# Altium PCB controlo_rev3.PcbDoc
Units mil, origin at the board's own origin, x right, y up, seen from the top; angles counter-clockwise.
Board outline 3939.96 x 3929 mil, 2 copper layers (Top Layer, Bottom Layer); 108 components, 133 nets, 406 pads, 265 vias.
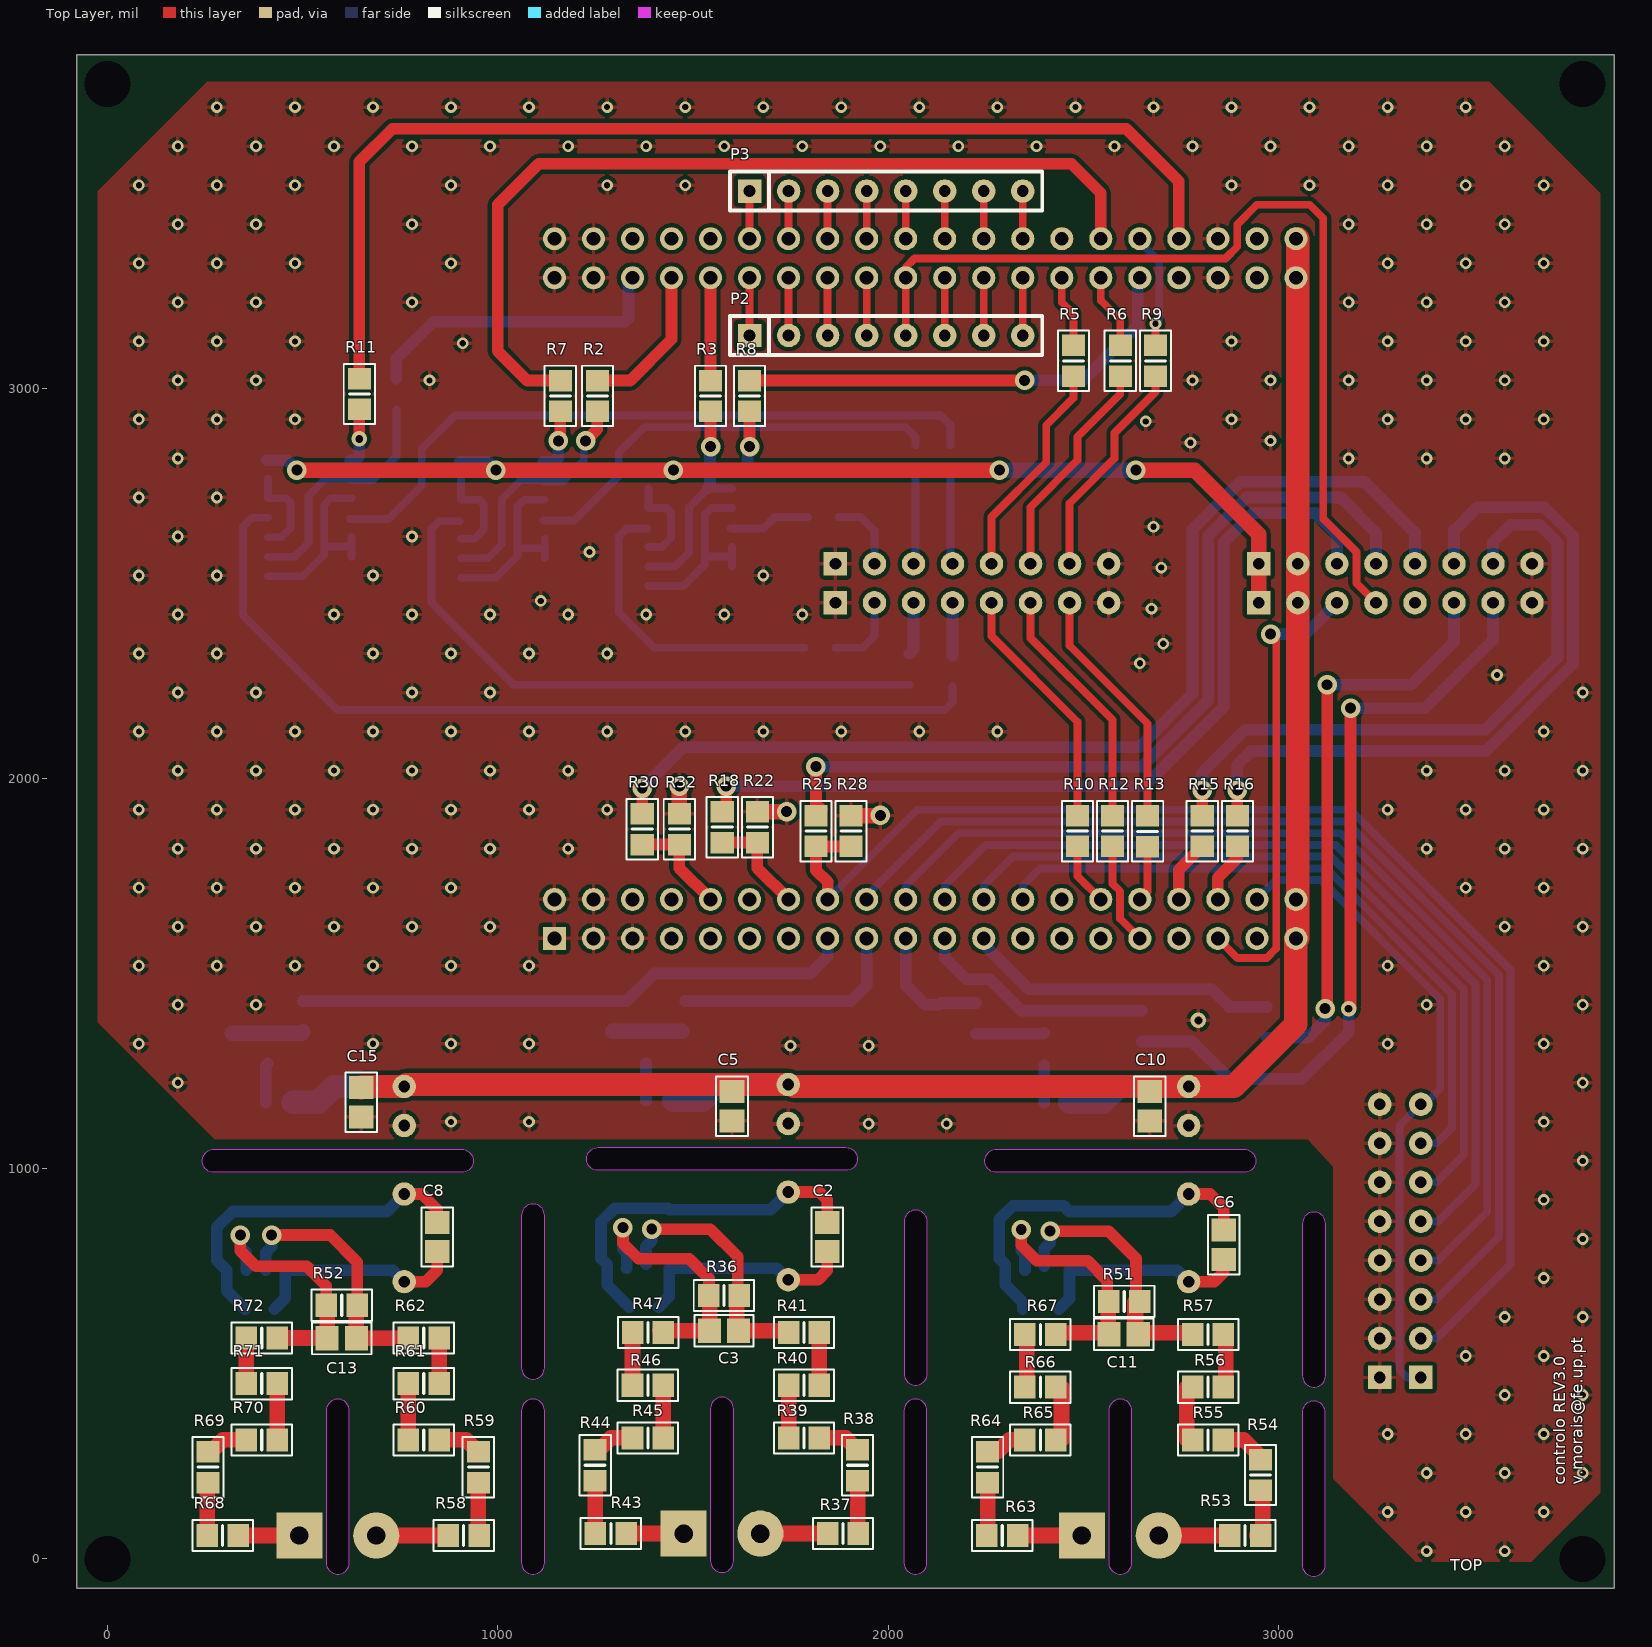
[diagram p0: Top Layer view]
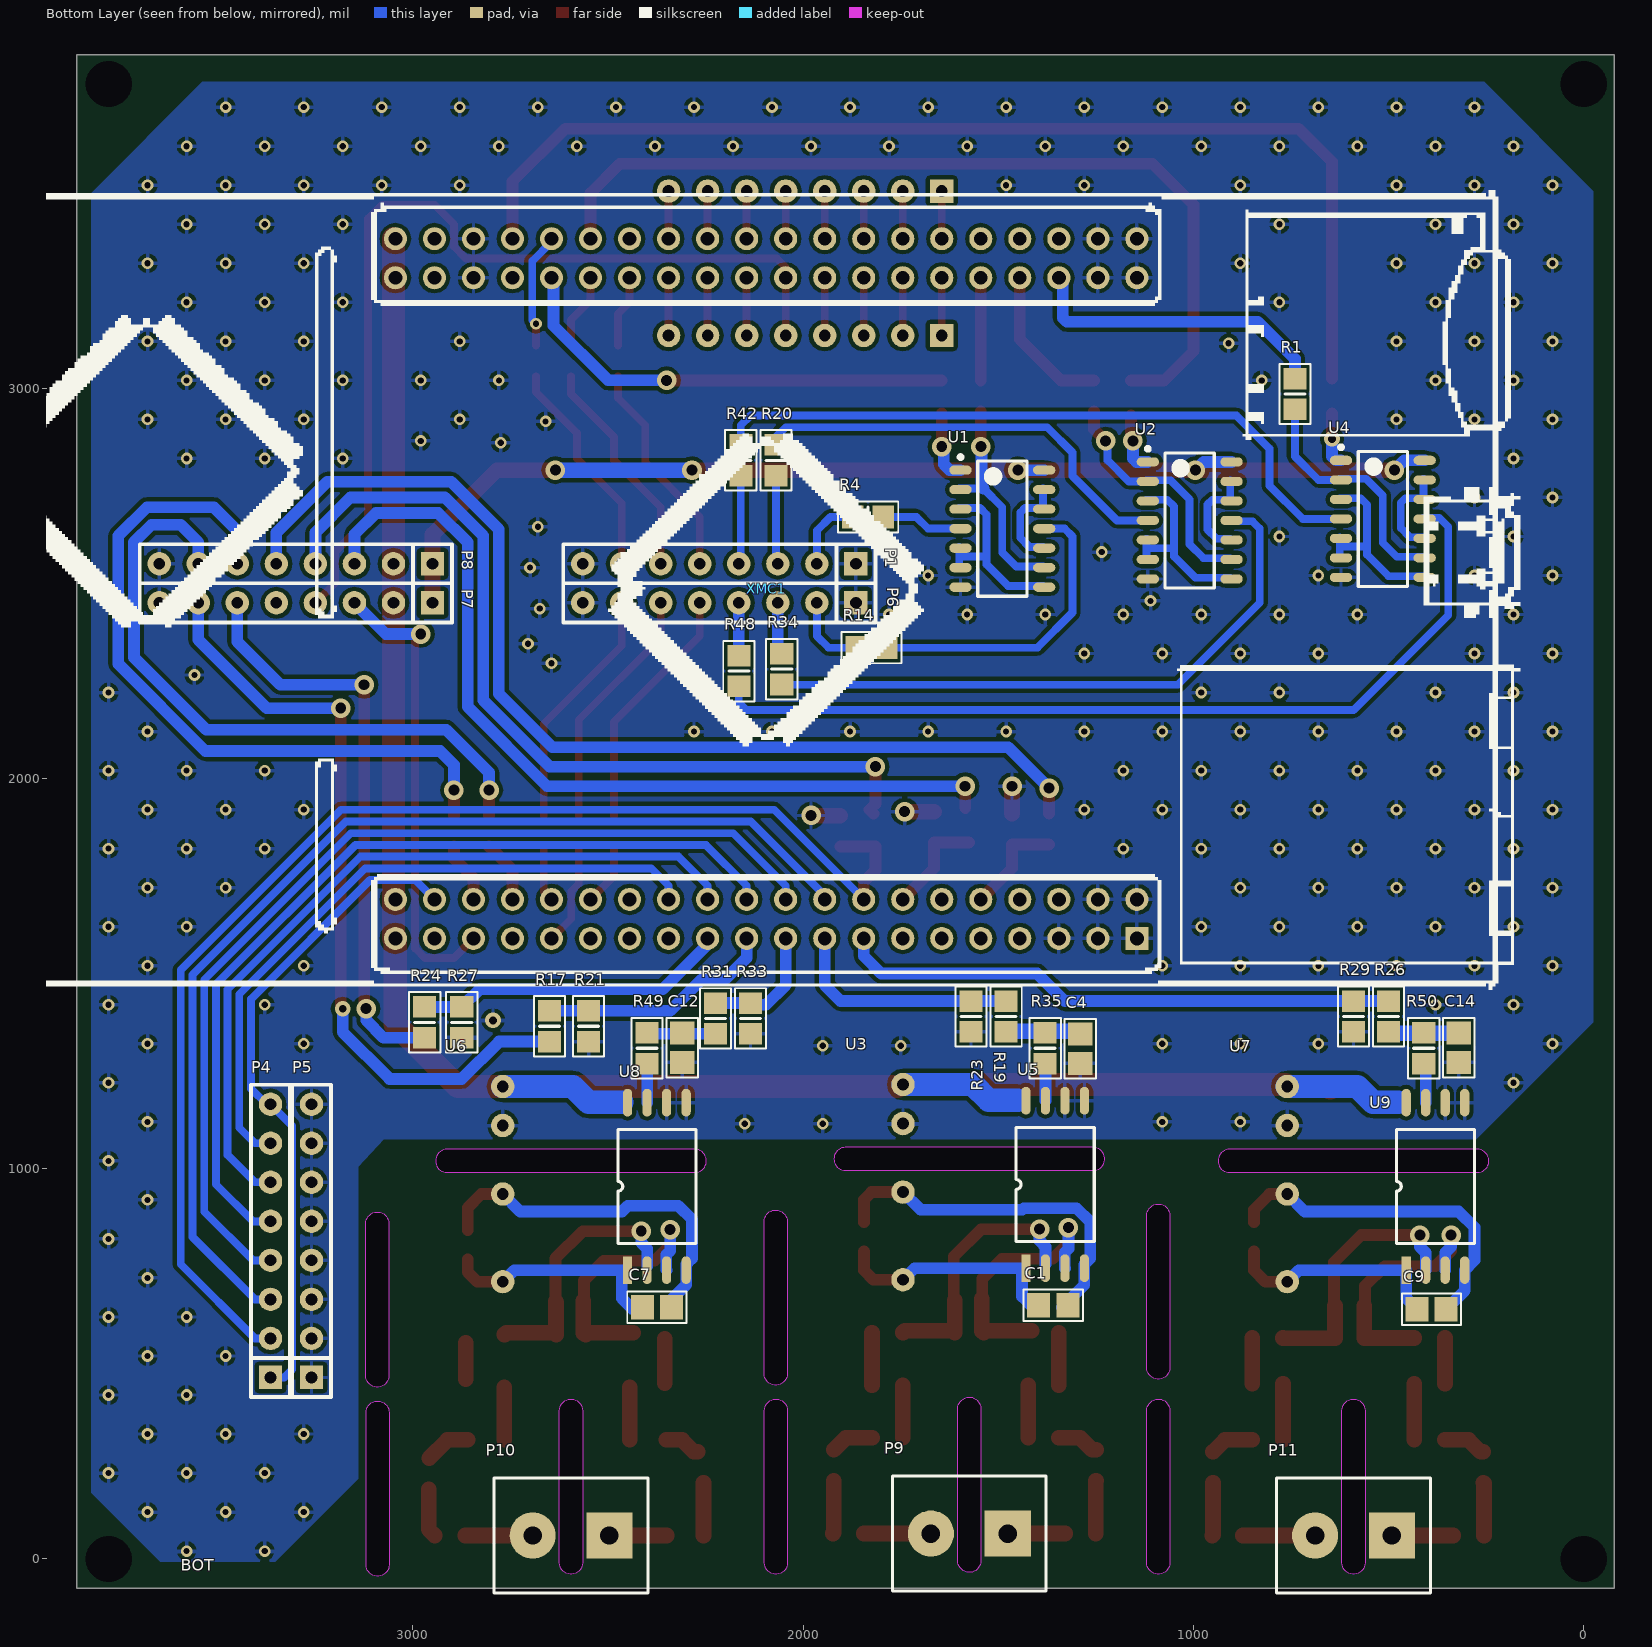
[diagram p1: Bottom Layer view, seen from below]

## Layer stack, top to bottom
Top Solder: solder mask 0.4, Solder Resist, Dk 3.5
Top Layer: signal copper 1.4
Dielectric 1: dielectric 12.6, FR-4, Dk 4.8
Bottom Layer: signal copper 1.4
Bottom Solder: solder mask 0.4, Solder Resist, Dk 3.5

## Board outline
-78.74,-75 805,-75 3220,-75 3861.22,-75 3861.22,3854 3220,3854 805,3854 -78.74,3854
cut-out: 560.46,-10 ccw(c590,-10) 619.54,-10 619.54,380 ccw(c590,380) 560.46,380
cut-out: 272.5,990.46 cw(c272.5,1020) 272.5,1049.54 907.5,1049.54 cw(c907.5,1020) 937.04,1020 cw(c907.5,1020) 907.5,990.46
cut-out: 1060.46,490 ccw(c1090,490) 1119.54,490 1119.54,880 ccw(c1090,880) 1060.46,880
cut-out: 1060.46,-10 ccw(c1090,-10) 1119.54,-10 1119.54,380 ccw(c1090,380) 1060.46,380
cut-out: 1256.87,995.46 cw(c1256.87,1025) 1256.87,1054.54 1891.87,1054.54 cw(c1891.87,1025) 1921.41,1025 cw(c1891.87,1025) 1891.87,995.46
cut-out: 1544.83,-5 ccw(c1574.37,-5) 1603.91,-5 1603.91,385 ccw(c1574.37,385) 1544.83,385
cut-out: 2041.09,474.41 ccw(c2070.63,474.41) 2100.17,474.41 2100.17,864.41 ccw(c2070.63,864.41) 2041.09,864.41
cut-out: 2040.46,-10 ccw(c2070,-10) 2099.54,-10 2099.54,380 ccw(c2070,380) 2040.46,380
cut-out: 2277.5,990.46 cw(c2277.5,1020) 2277.5,1049.54 2912.5,1049.54 cw(c2912.5,1020) 2942.04,1020 cw(c2912.5,1020) 2912.5,990.46
cut-out: 2565.46,-10 ccw(c2595,-10) 2624.54,-10 2624.54,380 ccw(c2595,380) 2565.46,380
cut-out: 3061.72,469.41 ccw(c3091.26,469.41) 3120.8,469.41 3120.8,859.41 ccw(c3091.26,859.41) 3061.72,859.41
cut-out: 3061.09,-15 ccw(c3090.63,-15) 3120.17,-15 3120.17,375 ccw(c3090.63,375) 3061.09,375

## Design rules (kind name [scope] priority, off if disabled: settings)
Clearance [All] p1: gap=10 ignorepadtopadclearanceinfootprint=FALSE
Height [All] p1: minheight=0 maxheight=10000 prefheight=500
HoleSize [All] p1: absolutevalues=TRUE maxlimit=1000 minlimit=1 maxpercent=80.000 minpercent=20.000
PlaneClearance [All] p1: clearance=100
PolygonConnect [All] p1: connectstyle=Relief reliefconductorwidth=10 reliefentries=4 polygonreliefangle="90 Angle" airgapwidth=10
RoomDefinition controlo_rev3 [InComponentClass('controlo_rev3')] p1: confinementstyle=ConfineIn formatcopy=TRUE lockcomponents=FALSE outline -1717.05,-3406.5 282.95,-3406.5 282.95,-2406.5 -1717.05,-2406.5
RoutingVias [All] p1: holewidth=28 width=50 viastyle="Through Hole" minholewidth=28 minwidth=50 maxholewidth=28 maxwidth=50
SilkToSilkClearance [All] p1: silktosilkclearance=1
SilkToSolderMaskClearance [IsPad] p1: minsilkscreentomaskgap=1 clearancetoexposedcopper=TRUE
SolderMaskExpansion [All] p1: expansion=4
Width [All] p1: maxlimit=150 minlimit=10 preferedwidth=30
25 further rules are at their usual default settings.

## Components (designator, comment, footprint, x,y, rotation, side; value= is the part's Value field where it differs from the comment)
C1 "C 10uF 0805 MLCC 25V X5R" CAPC_0805 1359.37,650 r0 bottom
C2 "C 10uF 0805 MLCC 25V X5R" CAPC_0805 1844.37,825 r270 top
C3 "C 1uF 0805 MLCC 50V X5R" CAPC_0805 1579.37,585 r180 top
C4 "C 10nF 0805 MLCC 50V X7R" CAPC_0805 1290,1307.18 r90 bottom
C5 "C 10uF 0805 MLCC 25V X5R" CAPC_0805 1600,1160 r90 top
C6 "C 10uF 0805 MLCC 25V X5R" CAPC_0805 2860,805 r270 top
C7 "C 10uF 0805 MLCC 25V X5R" CAPC_0805 2375,645 r0 bottom
C8 "C 10uF 0805 MLCC 25V X5R" CAPC_0805 845,825 r270 top
C9 "C 10uF 0805 MLCC 25V X5R" CAPC_0805 390,640 r0 bottom
C10 "C 10uF 0805 MLCC 25V X5R" CAPC_0805 2670,1160 r90 top
C11 "C 1uF 0805 MLCC 50V X5R" CAPC_0805 2603.59,575.54 r180 top
C12 "C 10nF 0805 MLCC 50V X7R" CAPC_0805 2310,1310 r90 bottom
C13 "C 1uF 0805 MLCC 50V X5R" CAPC_0805 600,565 r180 top
C14 "C 10nF 0805 MLCC 50V X7R" CAPC_0805 320,1310 r90 bottom
C15 "C 10uF 0805 MLCC 25V X5R" CAPC_0805 650,1170 r90 top
P1 "P 8p 2.54 SR DW 8P" "Header 8x1 8.5mm" 1865,2550 r0 bottom locked
P2 "P 8p 2.54 SR DW 8P" "Header 8x1 8.5mm" 1645,3135 r0 top
P3 "P 8p 2.54 SR DW 8P" "Header 8x1 8.5mm" 1645,3505 r0 top
P4 "P 8p 2.54 SR DW 8P" "Header 8x1 8.5mm" 3365,465 r90 bottom
P5 "P 8p 2.54 SR DW 8P" "Header 8x1 8.5mm" 3260,465 r90 bottom
P6 "P 8p 2.54 SR DW 8P" "Header 8x1 8.5mm" 1865,2450 r0 bottom locked
P7 "P 8p 2.54 SR DW 8P" "Header 8x1 8.5mm" 2950,2450 r0 bottom locked
P8 "P 8p 2.54 SR DW 8P" "Header 8x1 8.5mm" 2950,2550 r0 bottom locked
P9 "P 2p 5mm" connector1x2_parafuso 1574.37,65 r0 bottom
P10 "P 2p 5mm" connector1x2_parafuso 2595,60 r0 bottom
P11 "P 2p 5mm" connector1x2_parafuso 590,60 r0 bottom
R1 "R 0 1/8W 0805" RESC_0805 740,2985 r90 bottom
R2 "R 0 1/8W 0805" RESC_0805 1255,2980 r90 top
R3 "R 0 1/8W 0805" RESC_0805 1545,2980 r90 top
R4 "R 0 1/8W 0805" RESC_0805 1833.93,2670 r0 bottom
R5 "R 0 1/8W 0805" RESC_0805 2475,3070 r90 top
R6 "R 0 1/8W 0805" RESC_0805 2595,3070 r90 top
R7 "R 0 1/8W 0805" RESC_0805 1160,2980 r270 top
R8 "R 0 1/8W 0805" RESC_0805 1645,2980 r90 top
R9 "R 0 1/8W 0805" RESC_0805 2685,3070 r90 top
R10 "R 0 1/8W 0805" RESC_0805 2485,1865 r90 top
R11 "R 0 1/8W 0805" RESC_0805 645,2985 r270 top
R12 "R 0 1/8W 0805" RESC_0805 2575,1865 r270 top
R13 "R 0 1/8W 0805" RESC_0805 2665,1864.37 r90 top
R14 "R 0 1/8W 0805" RESC_0805 1825,2335 r0 bottom
R15 "R 0 1/8W 0805" RESC_0805 2805,1865 r90 top
R16 "R 0 1/8W 0805" RESC_0805 2895,1865 r90 top
R17 "R 5k1 1/8W 0805 .1%" RESC_0805 2650,1365 r270 bottom
R18 "R 5k1 1/8W 0805 .1%" RESC_0805 1575,1875 r90 top
R19 "R 5k1 1/8W 0805 .1%" RESC_0805 1480,1390 r270 bottom
R20 "R 0 1/8W 0805" RESC_0805 2070,2815 r270 bottom
R21 "R 7k5 1/8W 0805 .1%" RESC_0805 2550,1365 r90 bottom
R22 "R 7k5 1/8W 0805 .1%" RESC_0805 1665,1875 r270 top
R23 "R 7k5 1/8W 0805 .1%" RESC_0805 1570,1390 r90 bottom
R24 "R 5k1 1/8W 0805 .1%" RESC_0805 2970,1375 r270 bottom
R25 "R 5k1 1/8W 0805 .1%" RESC_0805 1815,1865 r90 top
R26 "R 5k1 1/8W 0805 .1%" RESC_0805 500,1390 r270 bottom
R27 "R 7k5 1/8W 0805 .1%" RESC_0805 2875,1375 r90 bottom
R28 "R 7k5 1/8W 0805 .1%" RESC_0805 1905,1865 r270 top
R29 "R 7k5 1/8W 0805 .1%" RESC_0805 590,1390 r90 bottom
R30 "R 5k1 1/8W 0805 .1%" RESC_0805 1370,1870 r90 top
R31 "R 5k1 1/8W 0805 .1%" RESC_0805 2225,1385 r270 bottom
R32 "R 7k5 1/8W 0805 .1%" RESC_0805 1465,1870 r270 top
R33 "R 7k5 1/8W 0805 .1%" RESC_0805 2135,1385 r90 bottom
R34 "R 0 1/8W 0805" RESC_0805 2055,2280 r90 bottom
R35 "R 330 1/8 0805 .1%" RESC_0805 1380,1308.59 r90 bottom
R36 "R 3k6 1/8W 0805 .1%" RESC_0805 1579.37,675 r180 top
R37 "R 100k 1/8W 0805 .1%" RESC_0805 1884.37,65 r0 top
R38 "R 100k 1/8W 0805 .1%" RESC_0805 1921.77,240 r90 top
R39 "R 100k 1/8W 0805 .1%" RESC_0805 1784.37,310 r180 top
R40 "R 100k 1/8W 0805 .1%" RESC_0805 1784.37,445 r0 top
R41 "R 100k 1/8W 0805 .1%" RESC_0805 1784.37,580 r180 top
R42 "R 0 1/8W 0805" RESC_0805 2160,2815 r270 bottom
R43 "R 100k 1/8W 0805 .1%" RESC_0805 1289.37,65 r180 top
R44 "R 100k 1/8W 0805 .1%" RESC_0805 1249.37,240 r90 top
R45 "R 100k 1/8W 0805 .1%" RESC_0805 1384.37,310 r0 top
R46 "R 100k 1/8W 0805 .1%" RESC_0805 1384.37,445 r180 top
R47 "R 100k 1/8W 0805 .1%" RESC_0805 1385,580 r0 top
R48 "R 0 1/8W 0805" RESC_0805 2165,2275 r90 bottom
R49 "R 330 1/8 0805 .1%" RESC_0805 2400,1308.59 r90 bottom
R50 "R 330 1/8 0805 .1%" RESC_0805 410,1308.59 r90 bottom
R51 "R 3k6 1/8W 0805 .1%" RESC_0805 2605,660 r180 top
R52 "R 3k6 1/8W 0805 .1%" RESC_0805 600,650 r180 top
R53 "R 100k 1/8W 0805 .1%" RESC_0805 2915,60 r0 top
R54 "R 100k 1/8W 0805 .1%" RESC_0805 2954.37,215 r90 top
R55 "R 100k 1/8W 0805 .1%" RESC_0805 2820,305 r180 top
R56 "R 100k 1/8W 0805 .1%" RESC_0805 2820,440 r0 top
R57 "R 100k 1/8W 0805 .1%" RESC_0805 2820,575 r180 top
R58 "R 100k 1/8W 0805 .1%" RESC_0805 912.46,60 r0 top
R59 "R 100k 1/8W 0805 .1%" RESC_0805 949.86,235 r90 top
R60 "R 100k 1/8W 0805 .1%" RESC_0805 810,305 r180 top
R61 "R 100k 1/8W 0805 .1%" RESC_0805 810,448.93 r0 top
R62 "R 100k 1/8W 0805 .1%" RESC_0805 810,566.07 r180 top
R63 "R 100k 1/8W 0805 .1%" RESC_0805 2292.4,60 r180 top
R64 "R 100k 1/8W 0805 .1%" RESC_0805 2255,235 r90 top
R65 "R 100k 1/8W 0805 .1%" RESC_0805 2390,305 r0 top
R66 "R 100k 1/8W 0805 .1%" RESC_0805 2390,440 r180 top
R67 "R 100k 1/8W 0805 .1%" RESC_0805 2390,575 r0 top
R68 "R 100k 1/8W 0805 .1%" RESC_0805 294.86,60 r180 top
R69 "R 100k 1/8W 0805 .1%" RESC_0805 257.46,235 r90 top
R70 "R 100k 1/8W 0805 .1%" RESC_0805 395,305 r0 top
R71 "R 100k 1/8W 0805 .1%" RESC_0805 395,448.93 r180 top
R72 "R 100k 1/8W 0805 .1%" RESC_0805 395,566.07 r0 top
U1 "IC NAND HEF4011" SOIC-14N 1489.72,2640 r180 bottom
U2 "IC NAND HEF4011" SOIC-14N 1009.72,2661 r180 bottom
U3 "IC CC/CC 1W 5V" DC/DC_ISO 1744.37,1215.59 r270 bottom
U4 "IC NAND HEF4011" SOIC-14N 514.72,2665 r180 bottom
U5 "IC AmpIso BIPOL AMC1200" SOIC8 1429.37,745 r90 bottom
U6 "IC CC/CC 1W 5V" DC/DC_ISO 2770,1210.59 r270 bottom
U7 "IC CC/CC 1W 5V" DC/DC_ISO 760,1210.59 r270 bottom
U8 "IC AmpIso BIPOL AMC1200" SOIC8 2450,740 r90 bottom
U9 "IC AmpIso BIPOL AMC1200" SOIC8 455,740 r90 bottom
XMC1 "IC XMC4500 Relax LITE" XMC4500 2095,2486.46 r270 bottom locked

## Footprints (in the part's own frame and the unit in brackets; to place one, negate y for a bottom-side part, rotate by r counter-clockwise, add the part's x,y. Pads: shape width x height; smd on the part's side, far side on the other; paste and mask are expansions set on the pad)
CAPC_0805 [mm] "Chip Capacitor, Body 2.0x1.3mm, IPC Low Density"
  rect 1.5x1.6 smd: 1(-0.95,0) 2(0.95,0)
  silkscreen extent -1.93,-1.03 1.93,1.03, body extent -1.1,-0.72 1.1,0.72, height 1.1
connector1x2_parafuso [mm] "Connector; Header; 2 Position"
  rect 3x3 hole 1.2: 1(-2.5,0)
  round 3 hole 1.2: 2(2.5,0)
  silkscreen extent -5,-3.75 5,3.75, body extent -4.92,-4.53 5.68,4.47, height 14.6
DC/DC_ISO [mil]
  round 60 hole 30: 1(0,0) 2(100,0) 3(275.59,0) 4(500,0)
  body extent -54,-149 572,80, height 315
"Header 8x1 8.5mm" [mil] "Stackable 8 pin header"
  rect 60x60 hole 30: 1(0,0)
  round 60 hole 30: 2(100,0) 3(200,0) 4(300,0) 5(400,0) 6(500,0) 7(600,0) 8(700,0)
  silkscreen extent -50,-50 750,50, body extent -50,-50 750,50, height 335
RESC_0805 [mm] "Chip Resistor, Body 2.0x1.3mm, IPC Low Density"
  rect 1.4x1.5 smd: 1(-1,0) 2(1,0)
  silkscreen extent -1.96,-1.01 1.96,1.01, body extent -1.07,-0.7 1.08,0.7, height 0.65
SOIC8 [mm]
  rect 1.8x0.6 smd: 1(0,0)
  oval 1.8x0.6 smd: 2(0,-1.27) 3(0,-2.54) 4(0,-3.81) 5(10.9,-3.81) 6(10.9,-2.54) 7(10.9,-1.27) 8(10.9,0)
  silkscreen extent 1.73,-4.45 9.17,0.63, body extent 1.7,-4.52 9.22,0.69, height 3
SOIC-14N [mm] "SOIC, 14-Leads, Body 8,65x3,90mm, Pitch 1,27mm, IPC Medium Density"
  oval 1.45x0.6 smd: 1(-2.725,3.81) 2(-2.725,2.54) 3(-2.725,1.27) 4(-2.725,0) 5(-2.725,-1.27) 6(-2.725,-2.54) 7(-2.725,-3.81) 8(2.725,-3.81) 9(2.725,-2.54) 10(2.725,-1.27) 11(2.725,0) 12(2.725,1.27) 13(2.725,2.54) 14(2.725,3.81)
  silkscreen extent -2.85,-4.4 1.6,4.78, body extent -2,-4.4 2,4.4, height 1.75
XMC4500 [mm]
  rect 1.5x1.5 hole 0.9: 1(22.77,24.13)
  round 1.5 hole 0.9: 2(22.77,21.59) 3(22.77,19.05) 4(22.77,16.51) 5(22.77,13.97) 6(22.77,11.43) 7(22.77,8.89) 8(22.77,6.35) 9(22.77,3.81) 10(22.77,1.27) 11(22.77,-1.27) 12(22.77,-3.81) 13(22.77,-6.35) 14(22.77,-8.89) 15(22.77,-11.43) 16(22.77,-13.97) 17(22.77,-16.51) 18(22.77,-19.05) 19(22.77,-21.59) 20(22.77,-24.13) 21(20.23,-24.13) 22(20.23,-21.59) 23(20.23,-19.05) 24(20.23,-16.51) 25(20.23,-13.97) 26(20.23,-11.43) 27(20.23,-8.89) 28(20.23,-6.35) 29(20.23,-3.81) 30(20.23,-1.27) 31(20.23,1.27) 32(20.23,3.81) 33(20.23,6.35) 34(20.23,8.89) 35(20.23,11.43) 36(20.23,13.97) 37(20.23,16.51) 38(20.23,19.05) 39(20.23,21.59) 40(20.23,24.13) 41(-20.23,24.13) 42(-20.23,21.59) 43(-20.23,19.05) 44(-20.23,16.51) 45(-20.23,13.97) 46(-20.23,11.43) 47(-20.23,8.89) 48(-20.23,6.35) 49(-20.23,3.81) 50(-20.23,1.27) 51(-20.23,-1.27) 52(-20.23,-3.81) 53(-20.23,-6.35) 54(-20.23,-8.89) 55(-20.23,-11.43) 56(-20.23,-13.97) 57(-20.23,-16.51) 58(-20.23,-19.05) 59(-20.23,-21.59) 60(-20.23,-24.13) 61(-22.77,-24.13) 62(-22.77,-21.59) 63(-22.77,-19.05) 64(-22.77,-16.51) 65(-22.77,-13.97) 66(-22.77,-11.43) 67(-22.77,-8.89) 68(-22.77,-6.35) 69(-22.77,-3.81) 70(-22.77,-1.27) 71(-22.77,1.27) 72(-22.77,3.81) 73(-22.77,6.35) 74(-22.77,8.89) 75(-22.77,11.43) 76(-22.77,13.97) 77(-22.77,16.51) 78(-22.77,19.05) 79(-22.77,21.59) 80(-22.77,24.13)
  silkscreen extent -25.92,-53.34 26.1,49.07, body extent -24.04,-25.4 24.04,25.4, height 8.5

## Part data
C1 C2 C5 C6 C7 C8 C9 C10 C15: library part "Capacitor SMD", "Capacitores de cerâmica multicamada MLCC - SMD/SMT 10uF 25V X5R +/-10% 0805 Gen Purp", Mouser VPN=963-TMK212BBJ106KG-T, Price=0,162
C3 C11 C13: library part "Capacitor SMD", "Capacitores de cerâmica multicamada MLCC - SMD/SMT 0805 50V 1uF 20% X5R", Mouser VPN=963-UMK212BJ105MG-T, Price=0,153
C4 C12 C14: library part "Capacitor SMD", "Capacitores de cerâmica multicamada MLCC - SMD/SMT 10nF 50V X7R 10%", Mouser VPN=603-CC805KRX7R9BB103, Price=0,099
P1 P2 P3 P4 P5 P6 P7 P8: library part jumper_8p, "Distribuidores e Alojamento de Fios CGrid Hrd SRDW THo le 8ckt", Mouser VPN=538-87937-0800, Price=0,621
P9 P10 P11: library part gen_purpose_conn_1x2, "Bloques de terminales de PCB de perfil estándar RS de 5,0 mm", Price=0,24, RS VPN=896-6696
R1 R2 R3 R4 R5 R6 R7 R8 R9 R10 R11 R12 R13 R14 R15 R16 R20 R34 R42 R48: library part Resistor, "Resistores de Filme Espesso - SMD 1/8Watt 0ohms Commercial Use", Mouser VPN=71-CRCW08050000Z0EAC, Price=0,09
R17 R18 R19 R24 R25 R26 R30 R31: library part Resistor, "Resistores de Filme Fino - SMD 0805 5.1Kohm 1/8W .1% 25ppm", Mouser VPN=667-ERA-6AEB512V, Price=0,324
R21 R22 R23 R27 R28 R29 R32 R33: library part Resistor, "Resistores de Filme Fino - SMD 7.5K OHM .1% 25ppm", Mouser VPN=66-PCF08C7.5KB, Price=0,135
R35 R49 R50: library part Resistor, "Resistores de Filme Fino - SMD CPF 0805 330R 0.1% 25PPM 1K RL", Mouser VPN=279-CPF0805B330RE1, Price=0,126
R36 R51 R52: library part Resistor, "Resistores de Filme Fino - SMD 1/8W 3.6K ohm .1% 25ppm", Mouser VPN=603-RT0805BRD073K6L, Price=0,387
R37 R38 R39 R40 R41 R43 R44 R45 R46 R47 R53 R54 R55 R56 R57 R58 R59 R60 R61 R62 R63 R64 R65 R66 R67 R68 R69 R70 R71 R72: library part Resistor, "Resistores de Filme Fino - SMD 100 Kohm .1% 0805 25PPM", Mouser VPN=284-APC0805B100KN, Price=0,126
U1 U2 U4: library part HEF4011, "Portas lógicas QUADRUPLE 2-INPUT NAND GATE", Mouser VPN=771-HEF4011BTD-T, Price=0,296
U3 U6 U7: library part DC/DC_ISO, "Conversores CC/CC com isolação 1W 5Vin 5Vout 200mA SIP7", Mouser VPN=919-RFB-0505S, Price=1,4
U5 U8 U9: library part AMC1200, "Amplificadores de isolamento 4kV peak Iso Amp", Mouser VPN=595-AMC1200BDWVR, Price=4,62
XMC1: library part XMC4500, "\"  KIT_XMC45_RELAX_LITE_V1 -  Evaluation Board, XMC4500 MCU, Detachable On-Board Debugger, USB Powered \"", Farnell VPN=2443552, Price=14,628, RS VPN=251-8418

## Free pads (board coordinates)
  round 60 hole 118.11 unplated: 4(0,0) 4(0,3779.53) 4(3779.53,0) 4(3779.53,3779.53)

## Via types
v1: diameter 30, hole 15.75, Top Layer to Bottom Layer, 234 vias
v2: diameter 50, hole 28, Top Layer to Bottom Layer, 28 vias
v3: diameter 40, hole 20, Top Layer to Bottom Layer, 3 vias

## Nets (pads, with @x,y where several pads share a name; then routed paths per layer and width w, separated by ;. In a path a pad name is that pad's centre, name@x,y a point inside that pad or via, vN(x,y) a via of type N, cw(c..) or ccw(c..) an arc to the next point about the centre after c; other vN are vias at no path point)
3V3: P7.1 P8.1 U1.14 U2.14 U4.14 | length 2965.1
  Top Layer w40: v2(485,2790) v2(995,2790) v2(1450,2790) v2(2285,2790) ; v2(2635,2790) 2785,2790 2950,2625 P8.1 P7.1
  Bottom Layer w30: U4.14 460,2815 v2(485,2790) ; U2.14 974,2811 v2(995,2790) ; U1.14 v2(1450,2790)
  Bottom Layer w40: v2(2285,2790) v2(2635,2790)
3V3GND: C4.1 C5.1 C10.1 C12.1 C14.1 C15.1 P1.1 P1.8 P5.1 P5.2 P5.3 P5.4 P5.5 P5.6 P5.7 P5.8 P6.1 P6.8 P7.8 P8.8 R21.1 R22.1 R23.1 R27.1 R28.1 R29.1 R32.1 R33.1 U1.7 U2.7 U3.2 U4.7 U5.5 U5.6 U6.2 U7.2 U8.5 U8.6 U9.5 U9.6 XMC1.1 XMC1.2 XMC1.3 XMC1.39 XMC1.40 XMC1.41 XMC1.42 XMC1.58 XMC1.63 XMC1.79 XMC1.80 | length 219.4
  Top Layer w40: R32.1 v2(1465,1980) ; R22.1 v2@1739.37,1914.37 ; R28.1 v2@1979.37,1904.37
  other v1: 3380,20 3580,20 3280,120 3480,120 3680,120 3380,220 3580,220 3780,220 3280,320 3480,320 3680,320 3580,420 3780,420 3480,520 3680,520 3580,620 3780,620 3680,720 3780,820 3680,920 3780,1020 1950,1115 2150,1115 880,1120 1080,1120 3680,1120 180,1220 3780,1220 1750,1315 1950,1315 80,1320 680,1320 880,1320 1080,1320 3280,1320 3680,1320 180,1420 380,1420 3380,1420 3780,1420 80,1520 280,1520 480,1520 680,1520 880,1520 1080,1520 3280,1520 3680,1520 180,1620 380,1620 580,1620 780,1620 980,1620 3580,1620 3780,1620 80,1720 280,1720 480,1720 680,1720 880,1720 3480,1720 3680,1720 180,1820 380,1820 580,1820 780,1820 980,1820 1180,1820 3380,1820 3580,1820 3780,1820 80,1920 280,1920 480,1920 680,1920 880,1920 1080,1920 1280,1920 3280,1920 3480,1920 3680,1920 180,2020 380,2020 580,2020 780,2020 980,2020 1180,2020 3380,2020 3580,2020 3780,2020 80,2120 280,2120 480,2120 680,2120 880,2120 1080,2120 1280,2120 1480,2120 1680,2120 1880,2120 2080,2120 2280,2120 3680,2120 180,2220 380,2220 780,2220 980,2220 3780,2220 3560,2265 2645,2295 80,2320 280,2320 680,2320 880,2320 1080,2320 1280,2320 2705,2345 180,2420 580,2420 780,2420 980,2420 1180,2420 1380,2420 1580,2420 1780,2420 2675,2435 1110,2455 80,2520 280,2520 680,2520 1680,2520 2700,2540 1235,2580 180,2620 780,2620 2680,2645 80,2720 280,2720 180,2820 3180,2820 3380,2820 3580,2820 2775,2860 2980,2865 2660,2915 80,2920 280,2920 480,2920 2880,2920 3280,2920 3480,2920 3680,2920 180,3020 380,3020 825,3020 2780,3020 2980,3020 3180,3020 3380,3020 3580,3020 910,3115 80,3120 280,3120 480,3120 2880,3120 3280,3120 3480,3120 3680,3120 180,3220 380,3220 780,3220 3180,3220 3380,3220 3580,3220 80,3320 280,3320 480,3320 880,3320 3280,3320 3480,3320 3680,3320 180,3420 380,3420 780,3420 3180,3420 3380,3420 3580,3420 80,3520 280,3520 480,3520 880,3520 1280,3520 1480,3520 2880,3520 3080,3520 3280,3520 3480,3520 3680,3520 180,3620 380,3620 580,3620 780,3620 980,3620 1180,3620 1380,3620 1580,3620 1780,3620 1980,3620 2180,3620 2380,3620 2580,3620 2780,3620 2980,3620 3180,3620 3380,3620 3580,3620 280,3720 480,3720 680,3720 880,3720 1080,3720 1280,3720 1480,3720 1680,3720 1880,3720 2080,3720 2280,3720 2480,3720 2680,3720 2880,3720 3080,3720 3280,3720 3480,3720
  other v2: 1980,1905 1740,1915
  other v3: 2795,1380
5V: C5.2 C10.2 C15.2 P7.2 P8.2 U3.1 U5.8 U6.1 U7.1 U8.8 U9.8 XMC1.20 XMC1.21 XMC1.60 XMC1.61 | length 5397.7
  Top Layer w60: C15.2 653.19,1210.59 U7.1 765,1215.59 U3.1 ; U3.1@1758.78,1210.59 U6.1 2885.59,1210.59 3045,1370 XMC1.20 ; XMC1.20@3050,1590 XMC1.61@3050,3382.91
  Bottom Layer w60: 475,1170 540,1170 580.59,1210.59 U7.1 ; 1450,1175 1524.37,1175 1564.96,1215.59 U3.1 ; 2465,1170 2550,1170 2590.59,1210.59 U6.1
ENA_U: R1.1 U4.2 U4.9 | length 631.8
  Bottom Layer w20: U4.9@410.72,2568 479,2568 515,2604 515,2725 558,2768 U4.2@625.28,2768 ; U4.2 680,2765 740,2825 R1.1
ENA_V: R2.1 U2.2 U2.9 | length 630.3
  Top Layer w30: v2(1225,2865) 1255,2895 R2.1
  Bottom Layer w20: U2.9@905.72,2564 974,2564 1010,2600 1010,2715 1059,2764 U2.2@1120.28,2764 ; U2.2 1166,2761 1220,2815 1220,2860 v2(1225,2865)
ENA_W: R3.1 U1.2 U1.9 | length 565.9
  Top Layer w30: v2(1545,2850) R3.1
  Bottom Layer w20: U1.9@1385.72,2543 1454,2543 1490,2579 1490,2695 1538,2743 U1.2@1600.28,2743
  Bottom Layer w30: 1538,2743 1543.46,2748.46 1543.46,2848.46 v2(1545,2850)
Gnd1: C6.1 C7.1 U6.3 U8.4 | length 941.3
  Top Layer w30: U6.3 2825,935 2860,900 C6.1
  Bottom Layer w30: C7.1@2345,640 2345,657.6 2300,702.6 U8.4 2300,755 2285,770 2285,870 2320,905 2449.56,905 2464.56,890 2725,890 U6.3
Gnd2: C8.1 C9.1 U7.3 U9.4 | length 889.4
  Top Layer w30: U7.3 805,935 845,895 C8.1
  Bottom Layer w30: C9.1 305,687.6 U9.4 280,765 280,850 320,890 715,890 U7.3
Gnd3: C1.1 C2.1 U3.3 U5.4 | length 929.8
  Top Layer w30: U3.3 1825,940 1844.37,920.63 C2.1
  Bottom Layer w30: C1.1@1336.97,645 1280,701.97 1280,754.37 1264.37,770 1264.37,863.58 1299.73,898.93 1435,898.93 1438.93,895 1699.37,895 U3.3
I_U: P8.5 R30.2 | length 2751.6
  Top Layer w30: R30.2 v2(1370,1975)
  Bottom Layer w30: v2(1370,1975) 1475,2080 2643.43,2080 2780,2216.57 2780,2638.14 2901.86,2760 3220,2760 3350,2630 P8.5
I_V: P8.4 R25.2 | length 2216
  Top Layer w30: v2(1815,2030) 1815,1934.37 1830,1919.37 R25.2@1820,1909.37
  Bottom Layer w30: v2(1815,2030) 2650,2030 2820,2200 2820,2621.57 2918.43,2720 3160,2720 3250,2630 P8.4
I_W: P8.3 R18.2 | length 2255.3
  Top Layer w30: R18.2@1585,1924.37 v2(1585,1980)
  Bottom Layer w30: v2(1585,1980) 2656.57,1980 2860,2183.43 2860,2605 2935,2680 3095,2680 3150,2625 P8.3
iabc_0: R30.1 R32.2 XMC1.36 | length 268.8
  Top Layer w30: R30.1 R32.2 1465,1770 XMC1.36
iabc_1: P4.2 R25.1 R28.2 XMC1.33 | length 3315.9
  Top Layer w30: XMC1.33 1845,1735 1815,1765 R25.1 R28.2
  Bottom Layer w20: XMC1.33 2074.53,1919.53 3184.53,1919.53 3595,1509.06 3595,755 3405,565 P4.2
iabc_2: R18.1 R22.2 XMC1.34 | length 263.8
  Top Layer w30: R18.1 R22.2 ; R22.2@1665,1830.63 1665,1770 XMC1.34
iso_ENA_UH: P1.7 R9.1 | length 571.8
  Top Layer w20: P1.7 2465,2705 2580,2820 2580,2885 2685,2990 R9.1
iso_ENA_UL: P6.7 R13.2 | length 629.1
  Top Layer w20: P6.7 2465,2340 2665,2140 R13.2
iso_ENA_VH: P1.6 R6.1 | length 575.9
  Top Layer w20: P1.6 2365,2695 2485,2815 2485,2875 2595,2985 R6.1
iso_ENA_VL: P6.6 R12.1 | length 632.6
  Top Layer w20: P6.6 2365,2360 2575,2150 R12.1
iso_ENA_WH: P1.5 R5.1 | length 567.6
  Top Layer w20: P1.5 2265,2670 2405,2810 2405,2905 2475,2975 R5.1
iso_ENA_WL: P6.5 R10.2 | length 636.8
  Top Layer w20: P6.5 2265,2365 2485,2145 R10.2
iso_PWM_UH: P1.4 R42.2 | length 227.7
  Bottom Layer w20: R42.2 2160,2555 P1.4
iso_PWM_UL: P6.4 R48.2 | length 135.6
  Bottom Layer w30: R48.2 P6.4
iso_PWM_VH: P1.3 R20.2 | length 227.7
  Bottom Layer w20: P1.3 2070,2555 R20.2
iso_PWM_VL: P6.3 R34.2 | length 134.8
  Bottom Layer w30: R34.2 2065,2329.37 P6.3
iso_PWM_WH: P1.2 R4.2 | length 191.2
  Bottom Layer w20: R4.2 1930,2670 1965,2635 P1.2
iso_PWM_WL: P6.2 R14.2 | length 198.1
  Bottom Layer w20: R14.2 1935,2335 1965,2365 P6.2
NetP2_1: P2.1 XMC1.46 | length 147.9
  Top Layer w20: P2.1 XMC1.46
NetP2_2: P2.2 XMC1.47 | length 147.9
  Top Layer w20: P2.2 XMC1.47
NetP2_3: P2.3 XMC1.48 | length 147.9
  Top Layer w20: P2.3 XMC1.48
NetP2_4: P2.4 XMC1.49 | length 147.9
  Top Layer w20: P2.4 XMC1.49
NetP2_6: P2.6 XMC1.51 | length 147.9
  Top Layer w20: P2.6 XMC1.51
NetP2_7: P2.7 XMC1.52 | length 147.9
  Top Layer w20: P2.7 XMC1.52
NetP2_8: P2.8 XMC1.53 | length 147.9
  Top Layer w20: P2.8 XMC1.53
NetP3_1: P3.1 XMC1.75 | length 122.1
  Top Layer w20: XMC1.75 P3.1
NetP3_2: P3.2 XMC1.74 | length 122.1
  Top Layer w20: XMC1.74 P3.2
NetP3_3: P3.3 XMC1.73 | length 122.1
  Top Layer w20: XMC1.73 P3.3
NetP3_4: P3.4 XMC1.72 | length 122.1
  Top Layer w20: XMC1.72 P3.4
NetP3_5: P3.5 XMC1.71 | length 122.1
  Top Layer w20: XMC1.71 P3.5
NetP3_6: P3.6 XMC1.70 | length 122.1
  Top Layer w20: XMC1.70 P3.6
NetP3_7: P3.7 XMC1.69 | length 122.1
  Top Layer w20: XMC1.69 P3.7
NetP3_8: P3.8 XMC1.68 | length 122.1
  Top Layer w20: XMC1.68 P3.8
NetP4_1: P4.1 P4.8 XMC1.22 | length 1679
  Bottom Layer w20: XMC1.22 2994.53,1739.53 3109.97,1739.53 3415,1434.5 3415,1205 3375,1165 P4.8 3310,1110 3310,485 3330,465 P4.1
NetP4_3: P4.3 XMC1.32 | length 2809.2
  Bottom Layer w20: XMC1.32 1945,1700 2134.53,1889.53 3172.1,1889.53 3565,1496.63 3565,825 3405,665 P4.3
NetP4_4: P4.4 XMC1.31 | length 2552.2
  Bottom Layer w20: XMC1.31 2045,1725 2179.53,1859.53 3159.68,1859.53 3535,1484.2 3535,890 3410,765 P4.4
NetP4_5: P4.5 XMC1.30 | length 2277.6
  Bottom Layer w20: XMC1.30 2145,1725 2249.53,1829.53 3147.25,1829.53 3505,1471.78 3505,960 3410,865 P4.5
NetP4_6: P4.6 XMC1.29 | length 2000.1
  Bottom Layer w20: XMC1.29 2245,1725 2319.53,1799.53 3134.82,1799.53 3475,1459.35 3475,1035 3405,965 P4.6
NetP4_7: P4.7 XMC1.28 | length 1725.6
  Bottom Layer w20: XMC1.28 2345,1725 2389.53,1769.53 3122.4,1769.53 3445,1446.92 3445,1105 3405,1065 P4.7
NetP9_1: P9.1 R43.1 | length 147.2
  Top Layer w40: R43.1 P9.1
NetP9_2: P9.2 R37.1 | length 172.2
  Top Layer w40: P9.2 R37.1
NetP10_1: P10.1 R63.1 | length 147.2
  Top Layer w40: R63.1@2349.37,60 P10.1
NetP10_2: P10.2 R53.1 | length 172.2
  Top Layer w40: P10.2 R53.1@2865.63,60
NetP11_1: P11.1 R68.1 | length 157.3
  Top Layer w40: R68.1 P11.1
NetP11_2: P11.2 R58.1 | length 184.7
  Top Layer w40: P11.2 R58.1
NetR1_2: R1.2 XMC1.43 | length 796.2
  Bottom Layer w30: R1.2 740,3075 835,3170 1325,3170 1335,3180 1335,3272.91 XMC1.43
NetR2_2: R2.2 XMC1.44 | length 391.7
  Top Layer w30: R2.2 1339.37,3019.37 1445,3125 XMC1.44
NetR3_2: R3.2 XMC1.45 | length 263.5
  Top Layer w30: R3.2 XMC1.45
NetR4_1: R4.1 U1.4 | length 210
  Bottom Layer w20: U1.4 1680,2640 1710,2670 R4.1
NetR5_2: R5.2 XMC1.54 | length 186
  Top Layer w20: XMC1.54 2445,3220 2475,3190 R5.2
NetR6_2: R6.2 XMC1.55 | length 194.3
  Top Layer w20: XMC1.55 2545,3225 2595,3175 R6.2
NetR7_1: R7.1 XMC1.66 | length 2303
  Top Layer w30: R7.1 1075.63,3019.37 1000,3095 1000,3470 1105,3575 2470,3575 2545,3500 XMC1.66
NetR8_2: R8.2 XMC1.56 | length 1178.2
  Top Layer w30: R8.2 2349.37,3019.37 v2(2350,3020)
  Bottom Layer w30: v2(2350,3020) 2500,3020 2640,3160 2640,3277.91 XMC1.56
NetR9_2: R9.2 XMC1.65 | length 298
  Top Layer w20: R9.2 v1(2685,3165)
  Bottom Layer w20: XMC1.65 2645,3375 2694.53,3325.47 2694.53,3174.53 v1(2685,3165)
NetR10_1: R10.1 XMC1.26 | length 160.5
  Top Layer w20: R10.1 2485,1750 XMC1.26
NetR11_1: R11.1 XMC1.64 | length 2893.8
  Top Layer w30: R11.1 645,3580 730,3665 2610,3665 2745,3530 XMC1.64
NetR12_2: R12.2 XMC1.16 | length 264.6
  Top Layer w20: R12.2 2575,1730.04 2594.53,1710.51 2594.53,1640.47 XMC1.16
NetR13_1: R13.1 XMC1.25 | length 143.3
  Top Layer w20: XMC1.25 2665,1710 R13.1
NetR14_1: R14.1 U1.11 | length 788.6
  Bottom Layer w20: U1.11 1330,2640 1310,2620 1310,2425 1400,2335 R14.1
NetR15_1: R15.1 XMC1.24 | length 160.5
  Top Layer w30: XMC1.24 2745,1765.63 R15.1
NetR16_1: R16.1 XMC1.23 | length 156.3
  Top Layer w30: XMC1.23 2845,1745 2895,1795 R16.1
NetR20_1: R20.1 U2.4 | length 1118.1
  Bottom Layer w20: U2.4 1196,2661 1310,2775 1310,2835 1375,2900 2045,2900 2070,2875 R20.1
NetR34_1: R34.1 U2.11 | length 1582.3
  Bottom Layer w20: U2.11@902.43,2659 849,2659 830,2640 830,2450 1040,2240 R34.1@2055,2240
NetR35_1: R35.1 U5.7 | length 95.1
  Bottom Layer w30: U5.7 R35.1@1379.37,1269.22
NetR37_2: R37.2 R38.1 | length 136.4
  Top Layer w40: R38.1 1921.77,66.97 R37.2
NetR38_2: R38.2 R39.1 | length 110.7
  Top Layer w40: R39.1 1891.14,310 R38.2
NetR39_2: R39.2 R40.1 | length 135
  Top Layer w40: R39.2 R40.1
NetR40_2: R40.2 R41.1 | length 135
  Top Layer w40: R40.2 R41.1
NetR42_1: R42.1 U4.4 | length 1764.4
  Bottom Layer w20: U4.4 720,2665 805,2750 805,2845 890,2930 2135,2930 2160,2905 R42.1
NetR43_2: R43.2 R44.1 | length 135.9
  Top Layer w40: R44.1 1250,200 R43.2
NetR44_2: R44.2 R45.1 | length 108.3
  Top Layer w40: R44.2 1259.37,279.37 1290,310 R45.1
NetR45_2: R45.2 R46.1 | length 135
  Top Layer w40: R45.2 R46.1
NetR46_2: R46.2 R47.1 | length 135.3
  Top Layer w40: R46.2 1345,579.37 R47.1
NetR48_1: R48.1 U4.11 | length 2267.8
  Bottom Layer w20: U4.11@410.72,2668 370,2668 347,2645 347,2418 590,2175 2145,2175 2165,2195 R48.1
NetR49_1: R49.1 U8.7 | length 95.1
  Bottom Layer w30: U8.7 R49.1@2400,1264.22
NetR50_1: R50.1 U9.7 | length 102.2
  Bottom Layer w30: U9.7 405,1264.22 R50.1
NetR53_2: R53.2 R54.1 | length 124.5
  Top Layer w40: R53.2@2944.37,60 2960,75.63 R54.1@2960,178.03
NetR54_2: R54.2 R55.1 | length 118.3
  Top Layer w40: R55.1 2911.77,305 R54.2@2958.39,258.39
NetR55_2: R55.2 R56.1 | length 135
  Top Layer w40: R55.2@2765.63,305 R56.1@2765.63,440
NetR56_2: R56.2 R57.1 | length 93.7
  Top Layer w40: R56.2@2865,460.63 R57.1@2865,554.37
NetR58_2: R58.2 R59.1 | length 136.4
  Top Layer w40: R59.1 949.86,61.97 R58.2
NetR59_2: R59.2 R60.1 | length 113.2
  Top Layer w40: R60.1 919.23,305 R59.2
NetR60_2: R60.2 R61.1 | length 143.9
  Top Layer w40: R60.2 R61.1
NetR61_2: R61.2 R62.1 | length 117.1
  Top Layer w40: R61.2 R62.1
NetR63_2: R63.2 R64.1 | length 135
  Top Layer w40: R63.2@2255.63,60 R64.1@2255.63,195
NetR64_2: R64.2 R65.1 | length 93.3
  Top Layer w40: R64.2@2270,274.37 2280,274.37 2310.63,305 R65.1
NetR65_2: R65.2 R66.1 | length 135
  Top Layer w40: R65.2@2444.37,305 R66.1@2444.37,440
NetR66_2: R66.2 R67.1 | length 113.1
  Top Layer w40: R66.2@2355,450.63 R67.1@2355,563.74
NetR68_2: R68.2 R69.1 | length 136.4
  Top Layer w40: R68.2 255.49,193.66 R69.1
NetR69_2: R69.2 R70.1 | length 110.9
  Top Layer w40: R69.2 264.37,274.37 295,305 R70.1
NetR70_2: R70.2 R71.1 | length 143.9
  Top Layer w40: R70.2 R71.1
NetR71_2: R71.2 R72.1 | length 117.1
  Top Layer w40: R71.2 R72.1
NetU1_3: U1.3 U1.5 U1.6 U1.8 | length 492.7
  Bottom Layer w20: U1.8@1385.72,2493 1475,2493 1530,2548 1530,2676 1547,2693 U1.3@1600.28,2693 ; 1530,2569 1600.28,2569 ; U1.6@1600.28,2543 U1.5@1600.28,2593
NetU1_10: U1.10 U1.12 U1.13 | length 245.5
  Bottom Layer w20: U1.10@1385.72,2593 1420,2593 1444,2617 1444,2681 1432,2693 1385.72,2693 U1.13@1385.72,2743
NetU2_3: U2.3 U2.5 U2.6 U2.8 | length 492.7
  Bottom Layer w20: U2.8@905.72,2514 995,2514 1050,2569 1050,2697 1067,2714 U2.3@1120.28,2714 ; 1050,2590 1120.28,2590 ; U2.6@1120.28,2564 U2.5@1120.28,2614
NetU2_10: U2.10 U2.12 U2.13 | length 245.5
  Bottom Layer w20: U2.10@905.72,2614 940,2614 964,2638 964,2702 952,2714 905.72,2714 U2.13@905.72,2764
NetU4_3: U4.3 U4.5 U4.6 U4.8 | length 492.7
  Bottom Layer w20: U4.8@410.72,2518 500,2518 555,2573 555,2701 572,2718 U4.3@625.28,2718 ; 555,2594 625.28,2594 ; U4.6@625.28,2568 U4.5@625.28,2618
NetU4_10: U4.10 U4.12 U4.13 | length 245.5
  Bottom Layer w20: U4.10@410.72,2618 445,2618 469,2642 469,2706 457,2718 410.72,2718 U4.13@410.72,2768
PWM_FAN: P2.5 P7.4 XMC1.50 | length 2400.2
  Top Layer w20: P2.5 XMC1.50 2045,3310 2067.44,3332.44 2864.57,3332.44 2894.53,3362.4 2894.53,3419.53 2945,3470 3080,3470 3115,3435 3115,2665 3200,2580 3200,2500 P7.4
PWM_U: R11.2 U4.1 | length 155.8
  Top Layer w30: v3(645,2870) R11.2@645,2935.63
  Bottom Layer w20: U4.1 U4.1@640,2815
  Bottom Layer w30: U4.1 635,2815 645,2825 v3(645,2870)
PWM_V: R7.2 U2.1 | length 154.4
  Top Layer w30: v2(1155,2865) 1160,2870 R7.2@1160,2930.63
  Bottom Layer w30: U2.1 1146,2811 1155,2820 v2(1155,2865)
PWM_W: R8.1 U1.1 | length 181.9
  Top Layer w30: v2(1645,2850) R8.1@1645,2935.63
  Bottom Layer w30: U1.1 1625,2790 1640,2805 1640,2845 v2(1645,2850)
Relay_1: P8.7 R15.2 | length 1695.1
  Top Layer w30: R15.2 v2(2805,1970)
  Bottom Layer w30: v2(2805,1970) 2805,2015 2915,2125 3530,2125 3715,2310 3715,2605 3670,2650 3595,2650 3550,2605 P8.7
Relay_2: P8.6 R16.2 | length 1871.1
  Top Layer w30: R16.2 v2(2895,1970)
  Bottom Layer w30: v2(2895,1970) 2895,2035 2930,2070 3531.57,2070 3755,2293.43 3755,2621.57 3681.57,2695 3510,2695 3450,2635 P8.6
TACH_FAN: P7.3 XMC1.18 | length 1195
  Top Layer w20: XMC1.18 2895,1540 2970,1540 2994.53,1564.53 2994.53,2355.47 v2(2980,2370)
  Bottom Layer w30: v2(2980,2370) 3070,2370 P7.3
temp: P7.6 R24.2 | length 1501
  Top Layer w30: v2(3120,1410) 3125,1415 v2(3125,2240)
  Bottom Layer w30: R24.2 3075.63,1335.63 3120,1380 v2(3120,1410) ; v2(3125,2240) 3340,2240 3450,2350 P7.6
temp_xmc: R24.1 R27.2 XMC1.12 | length 806.5
  Bottom Layer w30: XMC1.12 2245,1575 2360,1460 2829.37,1460 R27.2 R24.1
V_DC: P7.7 R17.2 | length 1983.9
  Top Layer w30: v3(3180,1410) 3185,1415 v2(3185,2180)
  Bottom Layer w30: R17.2 2779.37,1325.63 2875,1230 3060,1230 3180,1350 v3(3180,1410) ; v2(3185,2180) 3375,2180 3550,2355 P7.7
v_dc_xmc: R17.1 R21.2 XMC1.11 | length 611.2
  Bottom Layer w30: XMC1.11 2145,1540 2200,1485 2260,1485 2340.63,1404.37 R21.2 R17.1
vabc_0: R26.1 R29.2 XMC1.8 | length 1437.9
  Bottom Layer w30: R26.1 1329.37,1429.37 1400,1500 1800,1500 1845,1545 XMC1.8
vabc_1: R19.1 R23.2 XMC1.9 | length 601.8
  Bottom Layer w30: R19.1 1904.37,1429.37 1945,1470 XMC1.9
vabc_2: R31.1 R33.2 XMC1.10 | length 316.2
  Bottom Layer w30: XMC1.10 2045,1470 2095.31,1419.69 R33.2@2130.31,1419.69 ; R33.2 R31.1
Vamp1: C11.1 R51.1 R57.2 U8.2 | length 1119.7
  Top Layer w30: R51.1@2632.4,658.03 R51.1@2634.37,660 ; 2565,840 2635,770 ; 2565,840 v2(2415,840) 2565,840 ; 2565,840 2635,770 ; R51.1@2634.37,660 R51.1@2635,660.63 ; R51.1@2634.37,660 R51.1@2635,660.63 ; R51.1@2635,660.63 2635,770 ; R51.1@2635,660.63 2635,770
  Top Layer w40: R51.1@2632.4,658.03 2632.4,575 2634.37,576.97 R51.1@2634.37,660 ; C11.1@2637.4,580 2760.63,580 R57.2@2765.63,575 ; R57.2@2764.56,575 2765.63,576.07 R57.2@2764.56,575
  Bottom Layer w30: U8.2@2400,750 2400,795 2415,810 v2(2415,840)
Vamp2: C11.2 R51.2 R67.2 U8.3 | length 673
  Top Layer w30: v2(2341.07,843.93) 2341.07,803.93 2381.07,763.93 2511.07,763.93 2561.7,713.3 R51.2@2561.7,663.93
  Top Layer w40: R67.2@2435.44,580 2562.6,580 C11.2@2557.6,575 ; C11.2@2563.67,578.93 R51.2@2563.67,661.96
  Bottom Layer w30: v2(2341.07,843.93) 2341.07,789.56 2350.63,780 2350.63,740.63 U8.3
Vamp12: C13.1 R52.1 R62.2 U9.2 | length 675
  Top Layer w30: v2(420,830) 570,830 640,760 640,650.63 R52.1 R52.1@637.4,648.03
  Top Layer w40: R52.1@637.4,648.03 C13.1 769.56,565 R62.2
  Bottom Layer w30: U9.2 405,785 420,800 v2(420,830)
Vamp13: C3.1 R36.1 R41.2 U5.2 | length 673.1
  Top Layer w30: v2(1394.37,845) 1544.37,845 1614.37,775 1614.37,665.63 1613.74,665 R36.1@1611.77,663.03
  Top Layer w40: C3.1@1611.77,580 R36.1@1611.77,663.03 ; C3.1 1740,585 R41.2 ; R41.2@1743.93,580 R41.2@1745,581.07
  Bottom Layer w30: U5.2@1379.37,755 1379.37,800 1394.37,815 v2(1394.37,845)
Vamp22: C13.2 R52.2 R72.2 U9.3 | length 653.9
  Top Layer w30: v2(340,830) 340,790 380,750 510,750 560.63,699.37 R52.2
  Top Layer w40: R72.2 C13.2@561.53,566.07 ; C13.2 R52.2@562.6,648.03
  Bottom Layer w30: v2(340,830) 340,800 355,785 U9.3
Vamp23: C3.2 R36.2 R47.2 U5.3 | length 673
  Top Layer w30: v2(1320.44,848.93) 1320.44,808.93 1360.44,768.93 1490.44,768.93 1541.07,718.3 R36.2@1541.07,668.93
  Top Layer w40: R47.2@1414.81,585 C3.2 C3.2@1536.97,580 ; C3.2@1543.04,583.93 R36.2@1543.04,666.96
  Bottom Layer w30: v2(1320.44,848.93) 1320.44,794.56 1330,785 1330,745.63 U5.3
Vdd1: C6.2 C7.2 U6.4 U8.1 | length 561.3
  Top Layer w30: U6.4 2835.59,710.59 2860,735 C6.2
  Bottom Layer w30: C7.2@2437.4,640 2465,667.6 2465,740 2740.59,740 U6.4
Vdd2: C8.2 C9.2 U7.4 U9.1 | length 573.4
  Top Layer w30: U7.4 815.59,710.59 845,740 C8.2
  Bottom Layer w30: C9.2 455,667.6 U9.1 730.59,740 U7.4
Vdd3: C1.2 C2.2 U3.4 U5.1 | length 586.7
  Top Layer w30: U3.4 1820.59,715.59 1844.37,739.37 C2.2
  Bottom Layer w30: C1.2@1411.77,645 1439.37,672.6 1439.37,745 1714.96,745 U3.4
Vout1: C4.2 R19.2 R35.2 | length 176.8
  Bottom Layer w40: C4.2@1294.37,1352.4 R19.2@1471.14,1352.4
Vout2: C14.2 R26.2 R50.2 | length 181.3
  Bottom Layer w40: C14.2 496.77,1347.4 R26.2
Vout3: C12.2 R31.2 R49.2 | length 176
  Bottom Layer w30: R31.2 2397.67,1345.63 R49.2
pads on no net: P7.5 XMC1.4 XMC1.5 XMC1.6 XMC1.7 XMC1.13 XMC1.14 XMC1.15 XMC1.17 XMC1.19 XMC1.27 XMC1.35 XMC1.37 XMC1.38 XMC1.57 XMC1.59 XMC1.62 XMC1.67 XMC1.76 XMC1.77 XMC1.78

## Polygon pours and split planes (outlines as drawn)
3V3GND on Bottom Layer "Top Layer-No Net" (solid, remove dead copper, pour order 10): 275,1075 -25,1375 -25,3505 255,3785 3540,3785 3825,3500 3825,170 3647.5,-7.5 3352.5,-7.5 3140,205 3140,1005 3075,1075
3V3GND on Top Layer "Top Layer-No Net" (solid, remove dead copper, pour order 12): 275,1075 -25,1375 -25,3505 255,3785 3540,3785 3825,3500 3825,170 3647.5,-7.5 3352.5,-7.5 3140,205 3140,1005 3075,1075

## Silkscreen, mask and mechanical layers (free items; w line width, h text height)
Top Overlay:
  text "controlo REV3.0 / v.morais@fe.up.pt" at 3780,190 h30 r90
  text "TOP" at 3440,-30 h30
Bottom Overlay:
  text "BOT" at 3595,-30 h30